# EAGLE board yacc1buss 2 (EAGLE 7.5.0)
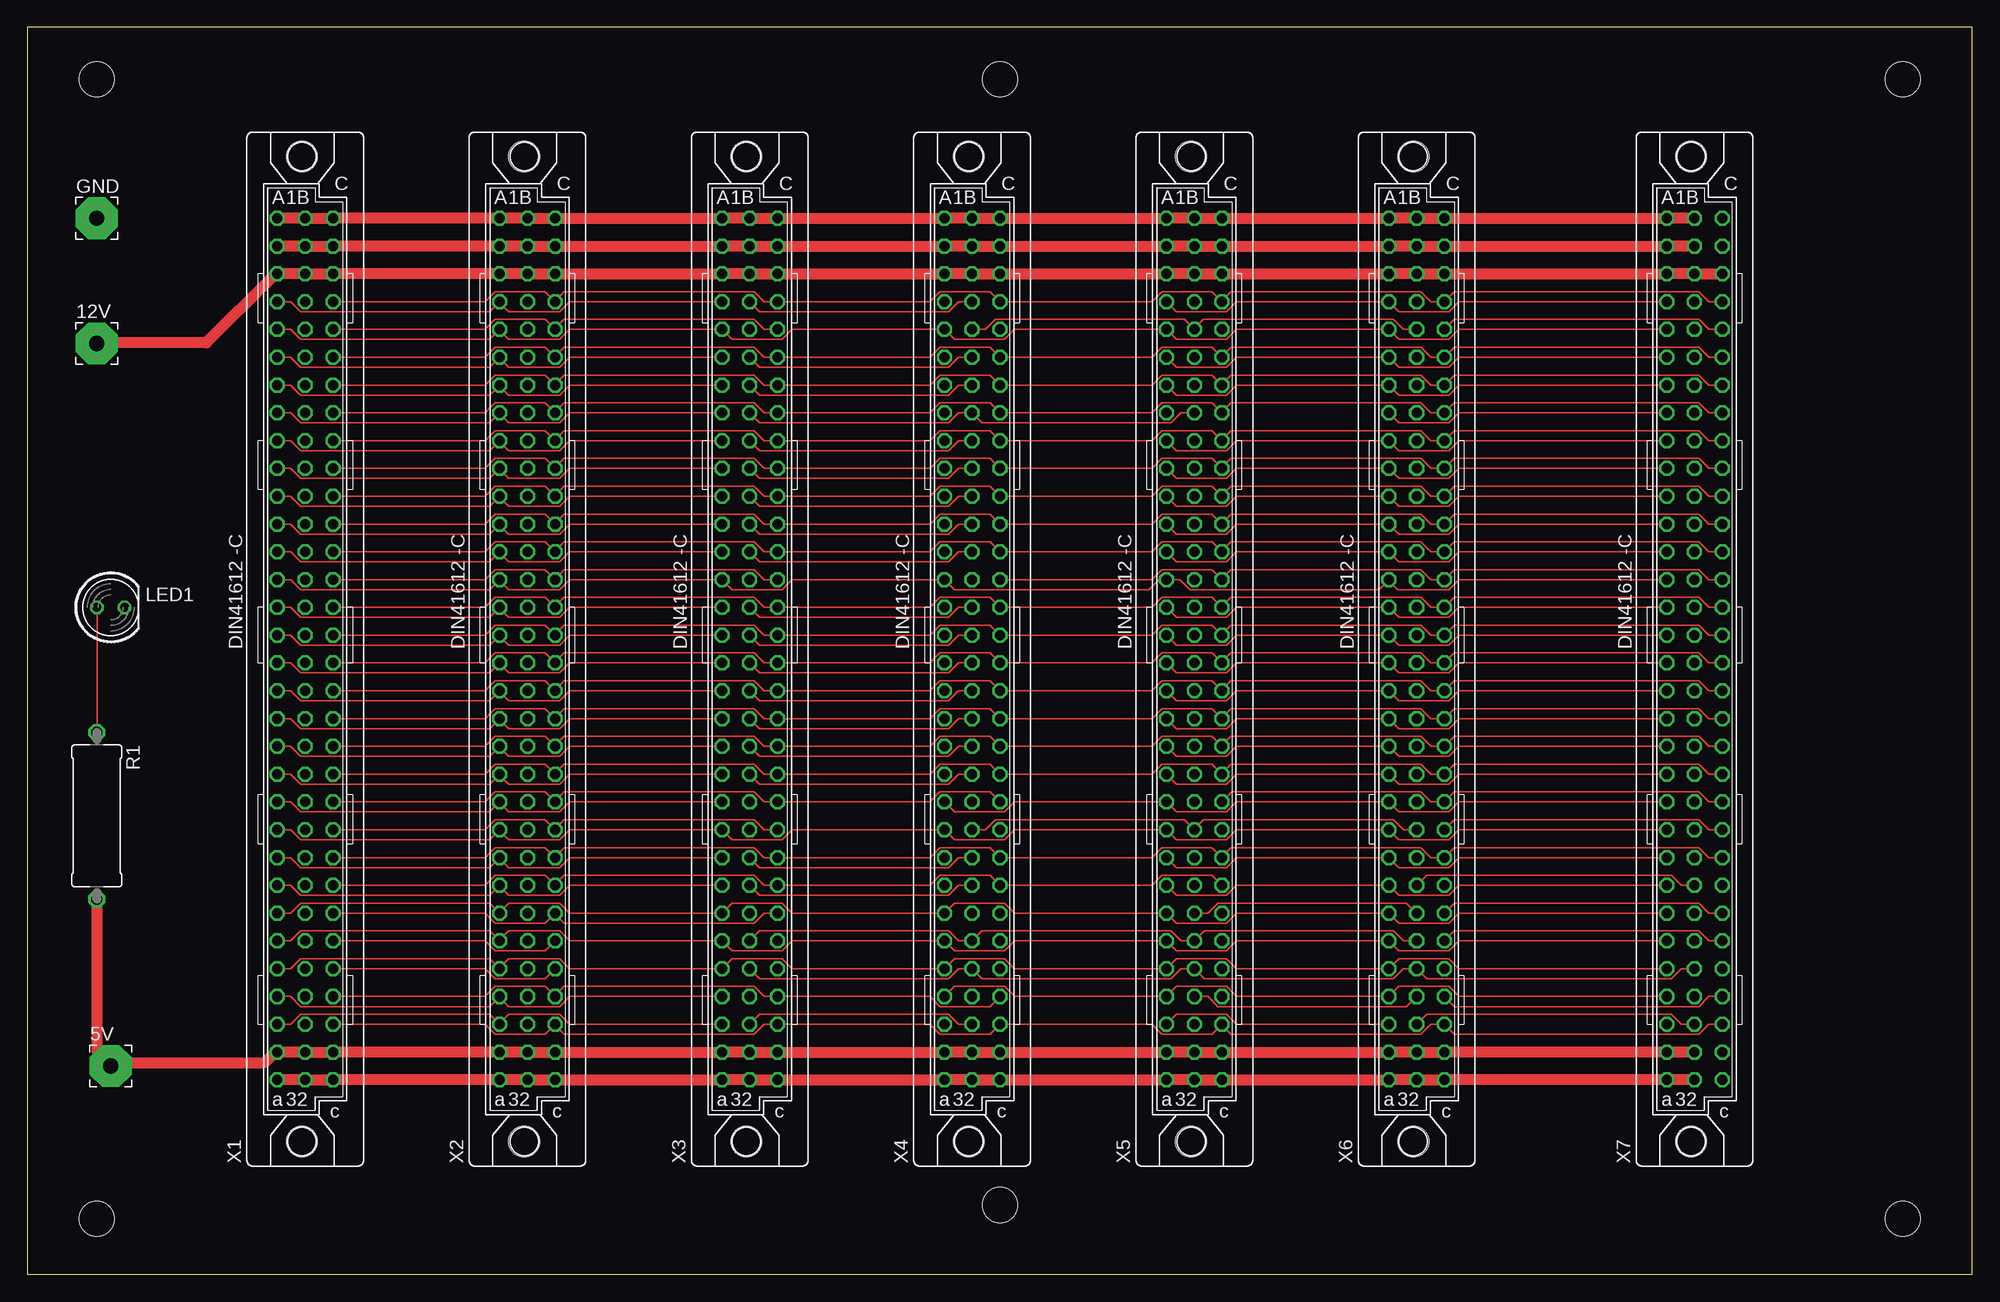
[diagram p0: board, top side]
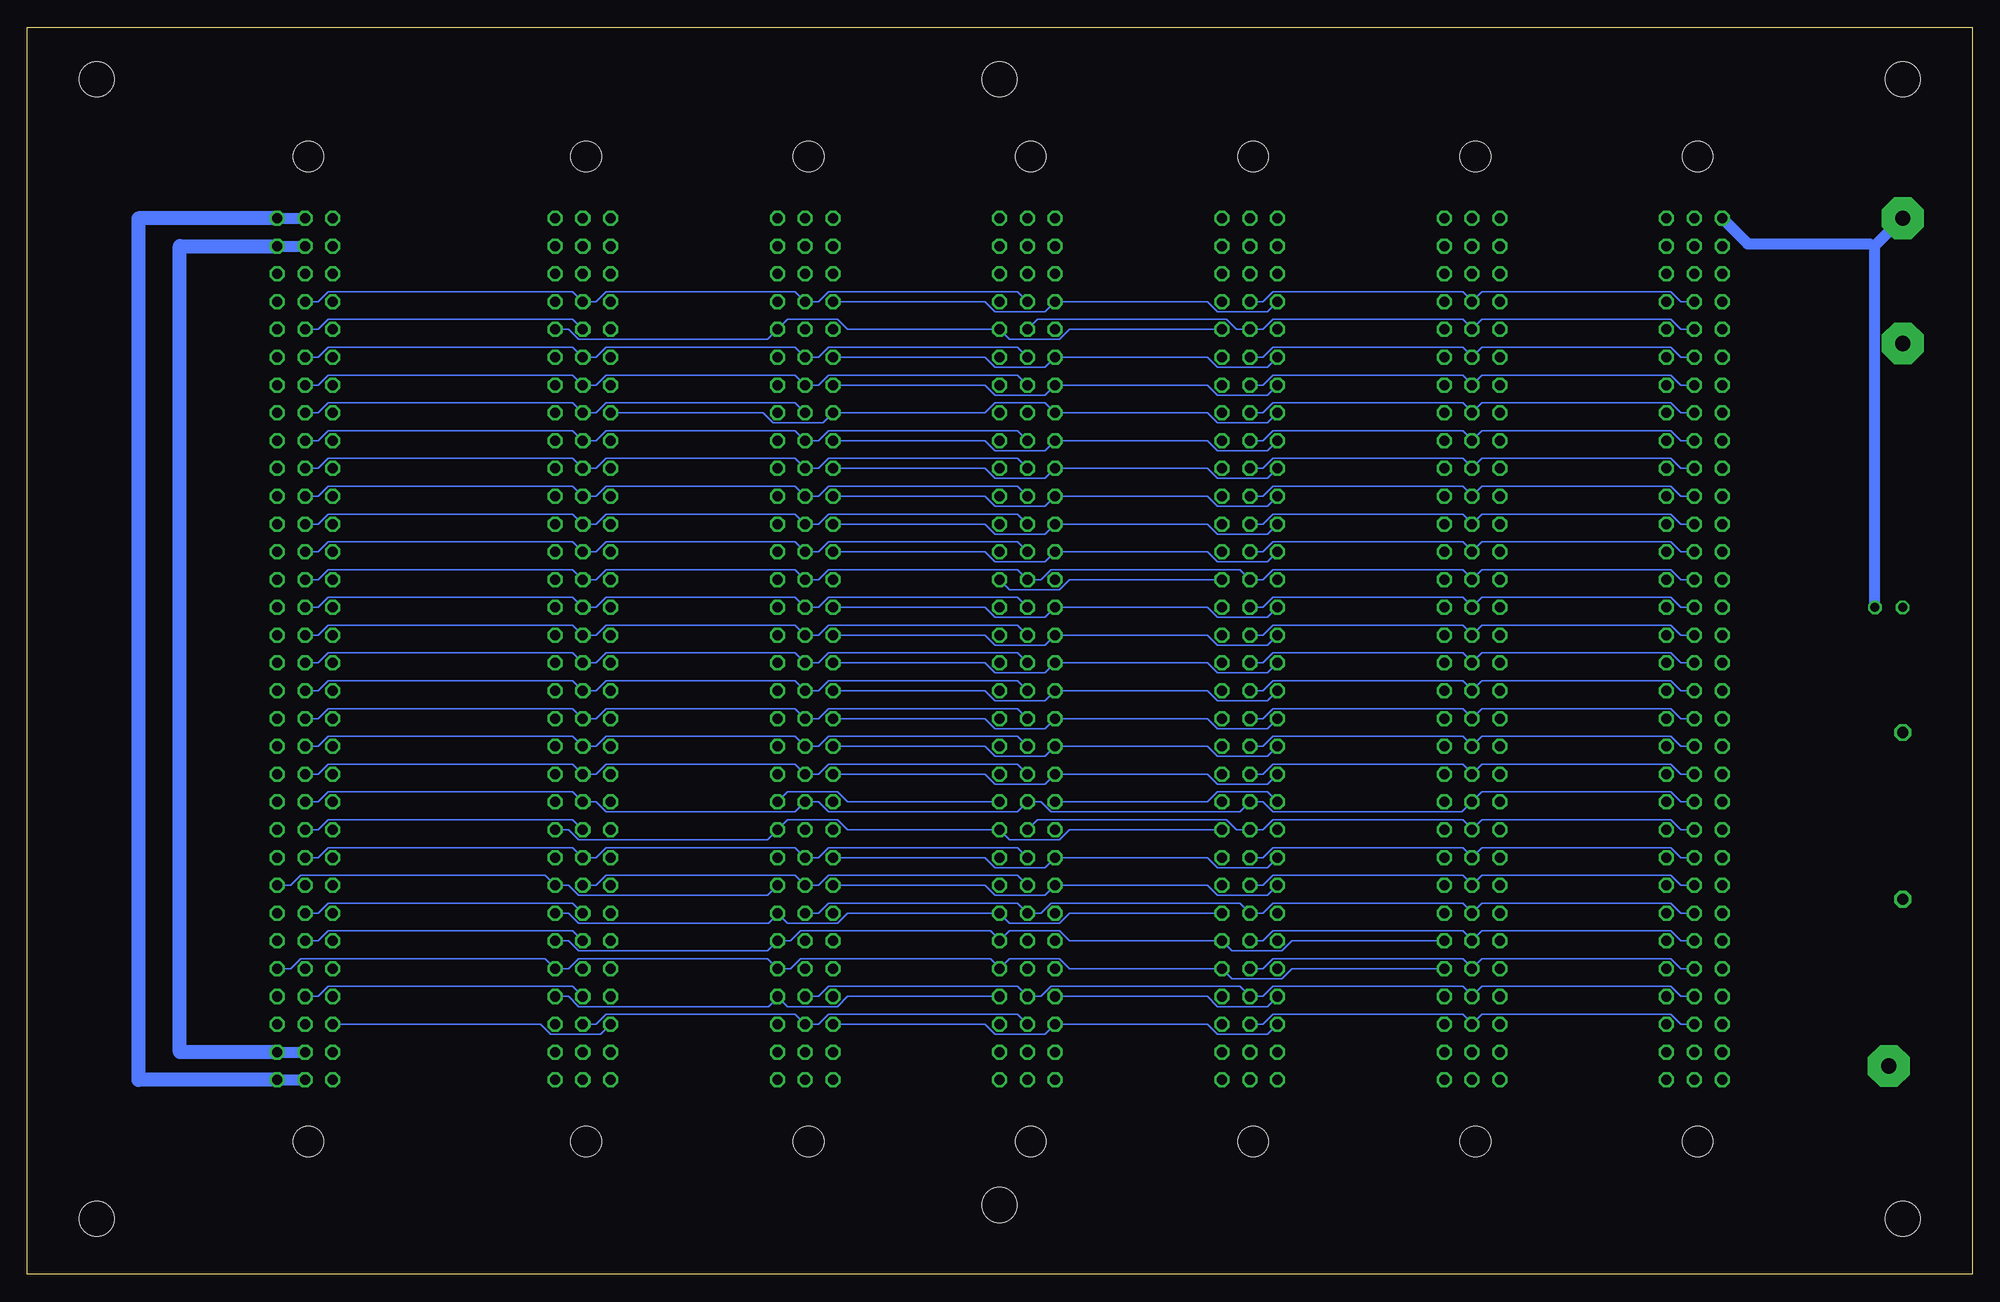
[diagram p1: board, bottom side, seen from below]

Size 177.78 x 113.97 mm. Coordinates in mm from the lower left corner, seen from the top.
Outline: 0,0 177.78,0 177.78,113.97 0,113.97 0,0
Copper layers (1*16): Top 0.0356mm / dielectric 1.5011mm / Bottom 0.0356mm
Design rules "LaenPCBOrder *": minimum track width 6mil, minimum drill 13mil, track to track 10mil, track to pad 6mil, pad to pad 6mil, via to via 6mil, smd to smd 6mil, copper to edge 15mil, drill to drill 6mil, minimum pad ring 7mil, minimum via ring 7mil, stop-mask expansion 3mil, vias tented up to drill 0mil, thermal gap 10mil
Net classes: 1 GND: width 1 mm; 2 5V: width 1 mm; 3 12V: width 1 mm
Holes 3.2 mm at 6.35,109.22 88.9,109.22 171.45,109.22 6.35,5.08 88.9,6.35 171.45,5.08

## Footprints (pad centres in the part's own frame; a part is rotated, then mirrored left to right if it is on the bottom)
3,81/1,4 = drill 1.397 pad 3.81 octagon: 1 0,0
LED5MM = drill 0.813 octagon: A -1.27,0; K 1.27,0
P0613/15 = drill 1.016 octagon: 1 -7.62,0; 2 7.62,0
FABC96S = drill 0.914 octagon: A1 -2.54,39.37; A2 -2.54,36.83; A3 -2.54,34.29; A4 -2.54,31.75; A5 -2.54,29.21; A6 -2.54,26.67; A7 -2.54,24.13; A8 -2.54,21.59; A9 -2.54,19.05; A10 -2.54,16.51; A11 -2.54,13.97; A12 -2.54,11.43; A13 -2.54,8.89; A14 -2.54,6.35; A15 -2.54,3.81; A16 -2.54,1.27; A17 -2.54,-1.27; A18 -2.54,-3.81; A19 -2.54,-6.35; A20 -2.54,-8.89; A21 -2.54,-11.43; A22 -2.54,-13.97; A23 -2.54,-16.51; A24 -2.54,-19.05; A25 -2.54,-21.59; A26 -2.54,-24.13; A27 -2.54,-26.67; A28 -2.54,-29.21; A29 -2.54,-31.75; A30 -2.54,-34.29; A31 -2.54,-36.83; A32 -2.54,-39.37; B1 0,39.37; B2 0,36.83; B3 0,34.29; B4 0,31.75; B5 0,29.21; B6 0,26.67; B7 0,24.13; B8 0,21.59; B9 0,19.05; B10 0,16.51; B11 0,13.97; B12 0,11.43; B13 0,8.89; B14 0,6.35; B15 0,3.81; B16 0,1.27; B17 0,-1.27; B18 0,-3.81; B19 0,-6.35; B20 0,-8.89; B21 0,-11.43; B22 0,-13.97; B23 0,-16.51; B24 0,-19.05; B25 0,-21.59; B26 0,-24.13; B27 0,-26.67; B28 0,-29.21; B29 0,-31.75; B30 0,-34.29; B31 0,-36.83; B32 0,-39.37; C1 2.54,39.37; C2 2.54,36.83; C3 2.54,34.29; C4 2.54,31.75; C5 2.54,29.21; C6 2.54,26.67; C7 2.54,24.13; C8 2.54,21.59; C9 2.54,19.05; C10 2.54,16.51; C11 2.54,13.97; C12 2.54,11.43; C13 2.54,8.89; C14 2.54,6.35; C15 2.54,3.81; C16 2.54,1.27; C17 2.54,-1.27; C18 2.54,-3.81; C19 2.54,-6.35; C20 2.54,-8.89; C21 2.54,-11.43; C22 2.54,-13.97; C23 2.54,-16.51; C24 2.54,-19.05; C25 2.54,-21.59; C26 2.54,-24.13; C27 2.54,-26.67; C28 2.54,-29.21; C29 2.54,-31.75; C30 2.54,-34.29; C31 2.54,-36.83; C32 2.54,-39.37 | hole 2.794: -0.305,45.009; -0.305,-45.009

## Placement (x,y rotation side)
5V  [3,81/1,4]  7.62,19.05 0 top
12V  [3,81/1,4]  6.35,85.09 0 top
GND  [3,81/1,4]  6.35,96.52 0 top
LED1  [LED5MM]  7.62,60.96 0 top
R1  330  [P0613/15]  6.35,41.91 270 top
X1  FABC96S  [FABC96S]  25.4,57.15 0 top
X2  FABC96S  [FABC96S]  45.72,57.15 0 top
X3  FABC96S  [FABC96S]  66.04,57.15 0 top
X4  FABC96S  [FABC96S]  86.36,57.15 0 top
X5  FABC96S  [FABC96S]  106.68,57.15 0 top
X6  FABC96S  [FABC96S]  127,57.15 0 top
X7  FABC96S  [FABC96S]  152.4,57.15 0 top

## Library data of the parts
5V 12V GND = wirepad
LED1 = led
R1 = resistor
X1-X7 = con-vg

## Nets
5V [5V]: 5V.1 R1.2 X1.A2 X1.A31 X1.B2 X1.B31 X1.C2 X1.C31 X2.A2 X2.A31 X2.B2 X2.B31 X2.C2 X2.C31 X3.A2 X3.A31 X3.B2 X3.B31 X3.C2 X3.C31 X4.A2 X4.A31 X4.B2 X4.B31 X4.C2 X4.C31 X5.A2 X5.A31 X5.B2 X5.B31 X5.C2 X5.C31 X6.A2 X6.A31 X6.B2 X6.B31 X6.C2 X6.C31 X7.A2 X7.A31 X7.B2 X7.B31 X7.C2 X7.C31
12V [12V]: 12V.1 X1.A3 X1.B3 X1.C3 X2.A3 X2.B3 X2.C3 X3.A3 X3.B3 X3.C3 X4.A3 X4.B3 X4.C3 X5.A3 X5.B3 X5.C3 X6.A3 X6.B3 X6.C3 X7.A3 X7.B3 X7.C3
GND [GND]: GND.1 LED1.K X1.A1 X1.A32 X1.B1 X1.B32 X1.C1 X1.C32 X2.A1 X2.A32 X2.B1 X2.B32 X2.C1 X2.C32 X3.A1 X3.A32 X3.B1 X3.B32 X3.C1 X3.C32 X4.A1 X4.A32 X4.B1 X4.B32 X4.C1 X4.C32 X5.A1 X5.A32 X5.B1 X5.B32 X5.C1 X5.C32 X6.A1 X6.A32 X6.B1 X6.B32 X6.C1 X6.C32 X7.A1 X7.A32 X7.B1 X7.B32 X7.C1 X7.C32
N$1: LED1.A R1.1
SIG0: X1.A4 X2.A4 X3.A4 X4.A4 X5.A4 X6.A4 X7.A4
SIG1: X1.B4 X2.B4 X3.B4 X4.B4 X5.B4 X6.B4 X7.B4
SIG2: X1.C4 X2.C4 X3.C4 X4.C4 X5.C4 X6.C4 X7.C4
SIG3: X1.A5 X2.A5 X3.A5 X4.A5 X5.A5 X6.A5 X7.A5
SIG4: X1.B5 X2.B5 X3.B5 X4.B5 X5.B5 X6.B5 X7.B5
SIG5: X1.C5 X2.C5 X3.C5 X4.C5 X5.C5 X6.C5 X7.C5
SIG6: X1.A6 X2.A6 X3.A6 X4.A6 X5.A6 X6.A6 X7.A6
SIG7: X1.B6 X2.B6 X3.B6 X4.B6 X5.B6 X6.B6 X7.B6
SIG8: X1.C6 X2.C6 X3.C6 X4.C6 X5.C6 X6.C6 X7.C6
SIG9: X1.A7 X2.A7 X3.A7 X4.A7 X5.A7 X6.A7 X7.A7
SIG10: X1.B7 X2.B7 X3.B7 X4.B7 X5.B7 X6.B7 X7.B7
SIG11: X1.C7 X2.C7 X3.C7 X4.C7 X5.C7 X6.C7 X7.C7
SIG12: X1.A8 X2.A8 X3.A8 X4.A8 X5.A8 X6.A8 X7.A8
SIG13: X1.B8 X2.B8 X3.B8 X4.B8 X5.B8 X6.B8 X7.B8
SIG14: X1.C8 X2.C8 X3.C8 X4.C8 X5.C8 X6.C8 X7.C8
SIG15: X1.A9 X2.A9 X3.A9 X4.A9 X5.A9 X6.A9 X7.A9
SIG16: X1.B9 X2.B9 X3.B9 X4.B9 X5.B9 X6.B9 X7.B9
SIG17: X1.C9 X2.C9 X3.C9 X4.C9 X5.C9 X6.C9 X7.C9
SIG18: X1.A10 X2.A10 X3.A10 X4.A10 X5.A10 X6.A10 X7.A10
SIG19: X1.B10 X2.B10 X3.B10 X4.B10 X5.B10 X6.B10 X7.B10
SIG20: X1.C10 X2.C10 X3.C10 X4.C10 X5.C10 X6.C10 X7.C10
SIG21: X1.A11 X2.A11 X3.A11 X4.A11 X5.A11 X6.A11 X7.A11
SIG22: X1.B11 X2.B11 X3.B11 X4.B11 X5.B11 X6.B11 X7.B11
SIG23: X1.C11 X2.C11 X3.C11 X4.C11 X5.C11 X6.C11 X7.C11
SIG24: X1.A12 X2.A12 X3.A12 X4.A12 X5.A12 X6.A12 X7.A12
SIG25: X1.B12 X2.B12 X3.B12 X4.B12 X5.B12 X6.B12 X7.B12
SIG26: X1.C12 X2.C12 X3.C12 X4.C12 X5.C12 X6.C12 X7.C12
SIG27: X1.A13 X2.A13 X3.A13 X4.A13 X5.A13 X6.A13 X7.A13
SIG28: X1.B13 X2.B13 X3.B13 X4.B13 X5.B13 X6.B13 X7.B13
SIG29: X1.C13 X2.C13 X3.C13 X4.C13 X5.C13 X6.C13 X7.C13
SIG30: X1.A14 X2.A14 X3.A14 X4.A14 X5.A14 X6.A14 X7.A14
SIG31: X1.B14 X2.B14 X3.B14 X4.B14 X5.B14 X6.B14 X7.B14
SIG32: X1.C14 X2.C14 X3.C14 X4.C14 X5.C14 X6.C14 X7.C14
SIG33: X1.A15 X2.A15 X3.A15 X4.A15 X5.A15 X6.A15 X7.A15
SIG34: X1.B15 X2.B15 X3.B15 X4.B15 X5.B15 X6.B15 X7.B15
SIG35: X1.C15 X2.C15 X3.C15 X4.C15 X5.C15 X6.C15 X7.C15
SIG36: X1.A16 X2.A16 X3.A16 X4.A16 X5.A16 X6.A16 X7.A16
SIG37: X1.B16 X2.B16 X3.B16 X4.B16 X5.B16 X6.B16 X7.B16
SIG38: X1.C16 X2.C16 X3.C16 X4.C16 X5.C16 X6.C16 X7.C16
SIG39: X1.A17 X2.A17 X3.A17 X4.A17 X5.A17 X6.A17 X7.A17
SIG40: X1.B17 X2.B17 X3.B17 X4.B17 X5.B17 X6.B17 X7.B17
SIG41: X1.C17 X2.C17 X3.C17 X4.C17 X5.C17 X6.C17 X7.C17
SIG42: X1.A18 X2.A18 X3.A18 X4.A18 X5.A18 X6.A18 X7.A18
SIG43: X1.B18 X2.B18 X3.B18 X4.B18 X5.B18 X6.B18 X7.B18
SIG44: X1.C18 X2.C18 X3.C18 X4.C18 X5.C18 X6.C18 X7.C18
SIG45: X1.A19 X2.A19 X3.A19 X4.A19 X5.A19 X6.A19 X7.A19
SIG46: X1.B19 X2.B19 X3.B19 X4.B19 X5.B19 X6.B19 X7.B19
SIG47: X1.C19 X2.C19 X3.C19 X4.C19 X5.C19 X6.C19 X7.C19
SIG48: X1.A20 X2.A20 X3.A20 X4.A20 X5.A20 X6.A20 X7.A20
SIG49: X1.B20 X2.B20 X3.B20 X4.B20 X5.B20 X6.B20 X7.B20
SIG50: X1.C20 X2.C20 X3.C20 X4.C20 X5.C20 X6.C20 X7.C20
SIG51: X1.A21 X2.A21 X3.A21 X4.A21 X5.A21 X6.A21 X7.A21
SIG52: X1.B21 X2.B21 X3.B21 X4.B21 X5.B21 X6.B21 X7.B21
SIG53: X1.C21 X2.C21 X3.C21 X4.C21 X5.C21 X6.C21 X7.C21
SIG54: X1.A22 X2.A22 X3.A22 X4.A22 X5.A22 X6.A22 X7.A22
SIG55: X1.B22 X2.B22 X3.B22 X4.B22 X5.B22 X6.B22 X7.B22
SIG56: X1.C22 X2.C22 X3.C22 X4.C22 X5.C22 X6.C22 X7.C22
SIG57: X1.A23 X2.A23 X3.A23 X4.A23 X5.A23 X6.A23 X7.A23
SIG58: X1.B23 X2.B23 X3.B23 X4.B23 X5.B23 X6.B23 X7.B23
SIG59: X1.C23 X2.C23 X3.C23 X4.C23 X5.C23 X6.C23 X7.C23
SIG60: X1.A24 X2.A24 X3.A24 X4.A24 X5.A24 X6.A24 X7.A24
SIG61: X1.B24 X2.B24 X3.B24 X4.B24 X5.B24 X6.B24 X7.B24
SIG62: X1.C24 X2.C24 X3.C24 X4.C24 X5.C24 X6.C24 X7.C24
SIG63: X1.A25 X2.A25 X3.A25 X4.A25 X5.A25 X6.A25 X7.A25
SIG64: X1.B25 X2.B25 X3.B25 X4.B25 X5.B25 X6.B25 X7.B25
SIG65: X1.C25 X2.C25 X3.C25 X4.C25 X5.C25 X6.C25 X7.C25
SIG66: X1.A26 X2.A26 X3.A26 X4.A26 X5.A26 X6.A26 X7.A26
SIG67: X1.B26 X2.B26 X3.B26 X4.B26 X5.B26 X6.B26 X7.B26
SIG68: X1.C26 X2.C26 X3.C26 X4.C26 X5.C26 X6.C26 X7.C26
SIG69: X1.A27 X2.A27 X3.A27 X4.A27 X5.A27 X6.A27 X7.A27
SIG70: X1.B27 X2.B27 X3.B27 X4.B27 X5.B27 X6.B27 X7.B27
SIG71: X1.C27 X2.C27 X3.C27 X4.C27 X5.C27 X6.C27 X7.C27
SIG72: X1.A28 X2.A28 X3.A28 X4.A28 X5.A28 X6.A28 X7.A28
SIG73: X1.B28 X2.B28 X3.B28 X4.B28 X5.B28 X6.B28 X7.B28
SIG74: X1.C28 X2.C28 X3.C28 X4.C28 X5.C28 X6.C28 X7.C28
SIG75: X1.A29 X2.A29 X3.A29 X4.A29 X5.A29 X6.A29 X7.A29
SIG76: X1.B29 X2.B29 X3.B29 X4.B29 X5.B29 X6.B29 X7.B29
SIG77: X1.C29 X2.C29 X3.C29 X4.C29 X5.C29 X6.C29 X7.C29
SIG78: X1.A30 X2.A30 X3.A30 X4.A30 X5.A30 X6.A30 X7.A30
SIG79: X1.B30 X2.B30 X3.B30 X4.B30 X5.B30 X6.B30 X7.B30
SIG80: X1.C30 X2.C30 X3.C30 X4.C30 X5.C30 X6.C30 X7.C30

## Tracks (layer width: path | path; a pad name or v marks a point on that pad's centre or on a via)
5V
  Top 1: R1.2 6.4,34.24 6.4,20.32 7.62,19.1 5V.1 8.03,19.3 21.64,19.3 22.45,20.12 X1.A31 X1.B31 X1.C31 X2.A31 X2.B31 X2.C31 X3.A31 X3.B31 X3.C31 X4.A31 X4.B31 X4.C31 X5.A31 X5.B31 X5.C31 X6.A31 X6.B31 X6.C31 X7.A31 X7.B31 | X7.B2 X7.A2 X6.C2 X6.B2 X6.A2 X5.C2 X5.B2 X5.A2 X4.C2 X4.B2 X4.A2 X3.C2 X3.B2 X3.A2 X2.C2 X2.B2 X2.A2 X1.C2 X1.B2 X1.A2
  Bottom 1: X7.C31 X7.B31 | X7.C2 X7.B2
  Bottom 1.27: X7.C31 163.83,20.32 163.83,93.98 X7.C2
12V
  Top 1: X7.C3 X7.B3 X7.A3 X6.C3 X6.B3 X6.A3 X5.C3 X5.B3 X5.A3 X4.C3 X4.B3 X4.A3 X3.C3 X3.B3 X3.A3 X2.C3 X2.B3 X2.A3 X1.C3 X1.B3 X1.A3 22.45,91.24 16.36,85.14 6.4,85.14 12V.1
GND
  Top 1: X1.A32 X1.B32 X1.C32 X2.A32 X2.B32 X2.C32 X3.A32 X3.B32 X3.C32 X4.A32 X4.B32 X4.C32 X5.A32 X5.B32 X5.C32 X6.A32 X6.B32 X6.C32 X7.A32 X7.B32 | X7.B1 X7.A1 X6.C1 X6.B1 X6.A1 X5.C1 X5.B1 X5.A1 X4.C1 X4.B1 X4.A1 X3.C1 X3.B1 X3.A1 X2.C1 X2.B1 X2.A1 X1.C1 X1.B1 X1.A1
  Bottom 1: X7.C32 X7.B32 | X7.C1 X7.B1 | 8.94,93.98 8.94,60.96 LED1.K | 8.94,93.98 6.4,96.52 GND.1 | X1.A1 20.52,94.18 9.35,94.18 8.94,93.98
  Bottom 1.27: X7.C1 167.64,96.52 167.64,17.78 X7.C32
N$1
  Top 0.152: LED1.A 6.4,60.96 6.4,49.58 R1.1
SIG0
  Top 0.152: X1.A4 24.08,88.9 24.99,87.99 42.27,87.99 X2.A4 43.18,88.8 43.99,87.99 48.67,87.99 49.58,88.9 X3.A4 | X5.A4 105.05,87.99 109.63,87.99 110.54,88.9 X6.A4 125.37,87.99 129.95,87.99 130.86,88.9 X7.A4
  Bottom 0.152: X3.A4 64.41,87.99 68.99,87.99 69.9,88.9 X4.A4 84.73,87.99 89.31,87.99 90.22,88.9 X5.A4
SIG1
  Top 0.152: X4.B4 85.14,88.9 84.23,87.99 66.95,87.99 X3.B4
  Bottom 0.152: X1.B4 26.62,88.9 27.53,89.81 44.81,89.81 X2.B4 45.72,89 46.53,89.81 63.91,89.81 64.82,88.9 X3.B4 | X4.B4 87.27,89.81 104.55,89.81 105.46,88.9 X5.B4 107.59,89.81 124.87,89.81 125.78,88.9 X6.B4 127.91,89.81 150.27,89.81 151.18,88.9 X7.B4
SIG2
  Top 0.152: X1.C4 41.86,88.9 42.77,89.81 47.35,89.81 X2.C4 48.26,89 49.07,89.81 66.45,89.81 67.36,88.9 X3.C4 82.5,88.9 83.41,89.81 87.99,89.81 X4.C4 102.82,88.9 103.73,89.81 108.31,89.81 X5.C4 109.22,89 110.03,89.81 127.41,89.81 128.32,88.9 X6.C4 130.45,89.81 152.81,89.81 153.72,88.9 X7.C4
SIG3
  Top 0.152: X1.A5 24.08,86.36 24.99,85.45 42.27,85.45 X2.A5 43.18,86.26 43.99,85.45 48.67,85.45 49.58,86.36 X3.A5 64.41,85.45 68.99,85.45 69.9,86.36 X4.A5 84.73,85.45 89.31,85.45 90.22,86.36 X5.A5 105.05,85.45 109.63,85.45 110.54,86.36 X6.A5 125.37,85.45 129.95,85.45 130.86,86.36 X7.A5
SIG4
  Top 0.152: X4.B5 87.58,86.36 88.49,87.27 105.77,87.27 X5.B5 106.68,86.46 107.49,87.27 124.87,87.27 125.78,86.36 X6.B5
  Bottom 0.152: X1.B5 26.62,86.36 27.53,87.27 44.81,87.27 X2.B5 45.72,86.46 46.53,87.27 63.91,87.27 64.82,86.36 X3.B5 67.26,86.36 68.17,87.27 85.45,87.27 X4.B5 | X7.B5 151.18,86.36 150.27,87.27 127.91,87.27 X6.B5
SIG5
  Top 0.152: X1.C5 41.86,86.36 42.77,87.27 47.35,87.27 X2.C5 48.26,86.46 49.07,87.27 66.45,87.27 67.36,86.36 X3.C5 | X7.C5 153.72,86.36 152.81,87.27 130.45,87.27 X6.C5
  Bottom 0.152: X6.C5 128.32,86.36 127.41,85.45 110.13,85.45 X5.C5 108.31,87.27 103.73,87.27 102.82,86.36 X4.C5 87.99,85.45 83.41,85.45 82.5,86.36 X3.C5
SIG6
  Top 0.152: X1.A6 24.08,83.82 24.99,82.91 42.27,82.91 X2.A6 43.18,83.72 43.99,82.91 48.67,82.91 49.58,83.82 X3.A6 | X5.A6 105.05,82.91 109.63,82.91 110.54,83.82 X6.A6 125.37,82.91 129.95,82.91 130.86,83.82 X7.A6
  Bottom 0.152: X3.A6 64.41,82.91 68.99,82.91 69.9,83.82 X4.A6 84.73,82.91 89.31,82.91 90.22,83.82 X5.A6
SIG7
  Top 0.152: X4.B6 85.14,83.82 84.23,82.91 66.95,82.91 X3.B6
  Bottom 0.152: X1.B6 26.62,83.82 27.53,84.73 44.81,84.73 X2.B6 45.72,83.92 46.53,84.73 63.91,84.73 64.82,83.82 X3.B6 | X4.B6 87.27,84.73 104.55,84.73 105.46,83.82 X5.B6 107.59,84.73 124.87,84.73 125.78,83.82 X6.B6 127.91,84.73 150.27,84.73 151.18,83.82 X7.B6
SIG8
  Top 0.152: X1.C6 41.86,83.82 42.77,84.73 47.35,84.73 X2.C6 48.26,83.92 49.07,84.73 66.45,84.73 67.36,83.82 X3.C6 82.5,83.82 83.41,84.73 87.99,84.73 X4.C6 102.82,83.82 103.73,84.73 108.31,84.73 X5.C6 109.22,83.92 110.03,84.73 127.41,84.73 128.32,83.82 X6.C6 130.45,84.73 152.81,84.73 153.72,83.82 X7.C6
SIG9
  Top 0.152: X1.A7 24.08,81.28 24.99,80.37 42.27,80.37 X2.A7 43.18,81.18 43.99,80.37 48.67,80.37 49.58,81.28 X3.A7 | X5.A7 105.05,80.37 109.63,80.37 110.54,81.28 X6.A7 125.37,80.37 129.95,80.37 130.86,81.28 X7.A7
  Bottom 0.152: X3.A7 64.41,80.37 68.99,80.37 69.9,81.28 X4.A7 84.73,80.37 89.31,80.37 90.22,81.28 X5.A7
SIG10
  Top 0.152: X4.B7 85.14,81.28 84.23,80.37 66.95,80.37 X3.B7
  Bottom 0.152: X1.B7 26.62,81.28 27.53,82.19 44.81,82.19 X2.B7 45.72,81.38 46.53,82.19 63.91,82.19 64.82,81.28 X3.B7 | X4.B7 87.27,82.19 104.55,82.19 105.46,81.28 X5.B7 107.59,82.19 124.87,82.19 125.78,81.28 X6.B7 127.91,82.19 150.27,82.19 151.18,81.28 X7.B7
SIG11
  Top 0.152: X1.C7 41.86,81.28 42.77,82.19 47.35,82.19 X2.C7 48.26,81.38 49.07,82.19 66.45,82.19 67.36,81.28 X3.C7 82.5,81.28 83.41,82.19 87.99,82.19 X4.C7 102.82,81.28 103.73,82.19 108.31,82.19 X5.C7 109.22,81.38 110.03,82.19 127.41,82.19 128.32,81.28 X6.C7 130.45,82.19 152.81,82.19 153.72,81.28 X7.C7
SIG12
  Top 0.152: X1.A8 24.08,78.74 24.99,77.83 42.27,77.83 X2.A8 43.18,78.64 43.99,77.83 48.67,77.83 49.58,78.74 X3.A8 | X7.A8 130.86,78.74 129.95,77.83 125.37,77.83 X6.A8
  Bottom 0.152: X3.A8 64.41,77.83 68.99,77.83 69.9,78.74 X4.A8 84.73,79.65 89.31,79.65 90.22,78.74 X5.A8 105.05,77.83 109.63,77.83 110.54,78.74 X6.A8
SIG13
  Top 0.152: X3.B8 66.95,77.83 84.23,77.83 85.14,78.74 X4.B8 87.27,77.83 104.55,77.83 105.46,78.74 X5.B8
  Bottom 0.152: X1.B8 26.62,78.74 27.53,79.65 44.81,79.65 X2.B8 45.72,78.84 46.53,79.65 63.91,79.65 64.82,78.74 X3.B8 | X5.B8 107.59,79.65 124.87,79.65 125.78,78.74 X6.B8 127.91,79.65 150.27,79.65 151.18,78.74 X7.B8
SIG14
  Top 0.152: X1.C8 41.86,78.74 42.77,79.65 47.35,79.65 X2.C8 48.26,78.84 49.07,79.65 66.45,79.65 67.36,78.74 X3.C8 82.5,78.74 83.41,79.65 87.99,79.65 X4.C8 102.82,78.74 103.73,79.65 108.31,79.65 X5.C8 109.22,78.84 110.03,79.65 127.41,79.65 128.32,78.74 X6.C8 130.45,79.65 152.81,79.65 153.72,78.74 X7.C8
SIG15
  Top 0.152: X1.A9 24.08,76.2 24.99,75.29 42.27,75.29 X2.A9 43.18,76.1 43.99,75.29 48.67,75.29 49.58,76.2 X3.A9 | X5.A9 105.05,75.29 109.63,75.29 110.54,76.2 X6.A9 125.37,75.29 129.95,75.29 130.86,76.2 X7.A9
  Bottom 0.152: X3.A9 64.41,75.29 68.99,75.29 69.9,76.2 X4.A9 84.73,75.29 89.31,75.29 90.22,76.2 X5.A9
SIG16
  Top 0.152: X4.B9 85.14,76.2 84.23,75.29 66.95,75.29 X3.B9
  Bottom 0.152: X1.B9 26.62,76.2 27.53,77.11 44.81,77.11 X2.B9 45.72,76.3 46.53,77.11 63.91,77.11 64.82,76.2 X3.B9 | X4.B9 87.27,77.11 104.55,77.11 105.46,76.2 X5.B9 107.59,77.11 124.87,77.11 125.78,76.2 X6.B9 127.91,77.11 150.27,77.11 151.18,76.2 X7.B9
SIG17
  Top 0.152: X1.C9 41.86,76.2 42.77,77.11 47.35,77.11 X2.C9 48.26,76.3 49.07,77.11 66.45,77.11 67.36,76.2 X3.C9 82.5,76.2 83.41,77.11 87.99,77.11 X4.C9 102.82,76.2 103.73,77.11 108.31,77.11 X5.C9 109.22,76.3 110.03,77.11 127.41,77.11 128.32,76.2 X6.C9 130.45,77.11 152.81,77.11 153.72,76.2 X7.C9
SIG18
  Top 0.152: X1.A10 24.08,73.66 24.99,72.75 42.27,72.75 X2.A10 43.18,73.56 43.99,72.75 48.67,72.75 49.58,73.66 X3.A10 | X5.A10 105.05,72.75 109.63,72.75 110.54,73.66 X6.A10 125.37,72.75 129.95,72.75 130.86,73.66 X7.A10
  Bottom 0.152: X3.A10 64.41,72.75 68.99,72.75 69.9,73.66 X4.A10 84.73,72.75 89.31,72.75 90.22,73.66 X5.A10
SIG19
  Top 0.152: X4.B10 85.14,73.66 84.23,72.75 66.95,72.75 X3.B10
  Bottom 0.152: X1.B10 26.62,73.66 27.53,74.57 44.81,74.57 X2.B10 45.72,73.76 46.53,74.57 63.91,74.57 64.82,73.66 X3.B10 | X4.B10 87.27,74.57 104.55,74.57 105.46,73.66 X5.B10 107.59,74.57 124.87,74.57 125.78,73.66 X6.B10 127.91,74.57 150.27,74.57 151.18,73.66 X7.B10
SIG20
  Top 0.152: X1.C10 41.86,73.66 42.77,74.57 47.35,74.57 X2.C10 48.26,73.76 49.07,74.57 66.45,74.57 67.36,73.66 X3.C10 82.5,73.66 83.41,74.57 87.99,74.57 X4.C10 102.82,73.66 103.73,74.57 108.31,74.57 X5.C10 109.22,73.76 110.03,74.57 127.41,74.57 128.32,73.66 X6.C10 130.45,74.57 152.81,74.57 153.72,73.66 X7.C10
SIG21
  Top 0.152: X1.A11 24.08,71.12 24.99,70.21 42.27,70.21 X2.A11 43.18,71.02 43.99,70.21 48.67,70.21 49.58,71.12 X3.A11 | X5.A11 105.05,70.21 109.63,70.21 110.54,71.12 X6.A11 125.37,70.21 129.95,70.21 130.86,71.12 X7.A11
  Bottom 0.152: X3.A11 64.41,70.21 68.99,70.21 69.9,71.12 X4.A11 84.73,70.21 89.31,70.21 90.22,71.12 X5.A11
SIG22
  Top 0.152: X4.B11 85.14,71.12 84.23,70.21 66.95,70.21 X3.B11
  Bottom 0.152: X1.B11 26.62,71.12 27.53,72.03 44.81,72.03 X2.B11 45.72,71.22 46.53,72.03 63.91,72.03 64.82,71.12 X3.B11 | X4.B11 87.27,72.03 104.55,72.03 105.46,71.12 X5.B11 107.59,72.03 124.87,72.03 125.78,71.12 X6.B11 127.91,72.03 150.27,72.03 151.18,71.12 X7.B11
SIG23
  Top 0.152: X1.C11 41.86,71.12 42.77,72.03 47.35,72.03 X2.C11 48.26,71.22 49.07,72.03 66.45,72.03 67.36,71.12 X3.C11 82.5,71.12 83.41,72.03 87.99,72.03 X4.C11 102.82,71.12 103.73,72.03 108.31,72.03 X5.C11 109.22,71.22 110.03,72.03 127.41,72.03 128.32,71.12 X6.C11 130.45,72.03 152.81,72.03 153.72,71.12 X7.C11
SIG24
  Top 0.152: X1.A12 24.08,68.58 24.99,67.67 42.27,67.67 X2.A12 43.18,68.48 43.99,67.67 48.67,67.67 49.58,68.58 X3.A12 | X5.A12 105.05,67.67 109.63,67.67 110.54,68.58 X6.A12 125.37,67.67 129.95,67.67 130.86,68.58 X7.A12
  Bottom 0.152: X3.A12 64.41,67.67 68.99,67.67 69.9,68.58 X4.A12 84.73,67.67 89.31,67.67 90.22,68.58 X5.A12
SIG25
  Top 0.152: X4.B12 85.14,68.58 84.23,67.67 66.95,67.67 X3.B12
  Bottom 0.152: X1.B12 26.62,68.58 27.53,69.49 44.81,69.49 X2.B12 45.72,68.68 46.53,69.49 63.91,69.49 64.82,68.58 X3.B12 | X4.B12 87.27,69.49 104.55,69.49 105.46,68.58 X5.B12 107.59,69.49 124.87,69.49 125.78,68.58 X6.B12 127.91,69.49 150.27,69.49 151.18,68.58 X7.B12
SIG26
  Top 0.152: X1.C12 41.86,68.58 42.77,69.49 47.35,69.49 X2.C12 48.26,68.68 49.07,69.49 66.45,69.49 67.36,68.58 X3.C12 82.5,68.58 83.41,69.49 87.99,69.49 X4.C12 102.82,68.58 103.73,69.49 108.31,69.49 X5.C12 109.22,68.68 110.03,69.49 127.41,69.49 128.32,68.58 X6.C12 130.45,69.49 152.81,69.49 153.72,68.58 X7.C12
SIG27
  Top 0.152: X1.A13 24.08,66.04 24.99,65.13 42.27,65.13 X2.A13 43.18,65.94 43.99,65.13 48.67,65.13 49.58,66.04 X3.A13 | X5.A13 105.05,65.13 109.63,65.13 110.54,66.04 X6.A13 125.37,65.13 129.95,65.13 130.86,66.04 X7.A13
  Bottom 0.152: X3.A13 64.41,65.13 68.99,65.13 69.9,66.04 X4.A13 84.73,65.13 89.31,65.13 90.22,66.04 X5.A13
SIG28
  Top 0.152: X4.B13 85.14,66.04 84.23,65.13 66.95,65.13 X3.B13
  Bottom 0.152: X1.B13 26.62,66.04 27.53,66.95 44.81,66.95 X2.B13 45.72,66.14 46.53,66.95 63.91,66.95 64.82,66.04 X3.B13 | X4.B13 87.27,66.95 104.55,66.95 105.46,66.04 X5.B13 107.59,66.95 124.87,66.95 125.78,66.04 X6.B13 127.91,66.95 150.27,66.95 151.18,66.04 X7.B13
SIG29
  Top 0.152: X1.C13 41.86,66.04 42.77,66.95 47.35,66.95 X2.C13 48.26,66.14 49.07,66.95 66.45,66.95 67.36,66.04 X3.C13 82.5,66.04 83.41,66.95 87.99,66.95 X4.C13 102.82,66.04 103.73,66.95 108.31,66.95 X5.C13 109.22,66.14 110.03,66.95 127.41,66.95 128.32,66.04 X6.C13 130.45,66.95 152.81,66.95 153.72,66.04 X7.C13
SIG30
  Top 0.152: X7.A14 130.86,63.5 129.95,62.59 125.27,62.59 124.46,63.4 X6.A14 123.55,62.59 106.27,62.59 105.36,63.5 X5.A14 103.43,63.5 102.51,62.59 84.73,62.59 X4.A14 69.9,63.5 68.99,62.59 64.41,62.59 X3.A14 49.58,63.5 48.67,62.59 43.99,62.59 43.18,63.4 X2.A14 42.27,62.59 24.99,62.59 24.08,63.5 X1.A14
SIG31
  Bottom 0.152: X1.B14 26.62,63.5 27.53,64.41 44.81,64.41 X2.B14 45.72,63.6 46.53,64.41 63.91,64.41 64.82,63.5 X3.B14 66.95,64.41 84.23,64.41 85.14,63.5 X4.B14 87.27,64.41 104.55,64.41 105.46,63.5 X5.B14 107.59,64.41 124.87,64.41 125.78,63.5 X6.B14 127.91,64.41 150.27,64.41 151.18,63.5 X7.B14
SIG32
  Top 0.152: X1.C14 41.86,63.5 42.77,64.41 47.35,64.41 X2.C14 48.26,63.6 49.07,64.41 66.45,64.41 67.36,63.5 X3.C14 | X4.C14 102.82,63.5 103.73,64.41 108.31,64.41 X5.C14 109.22,63.6 110.03,64.41 127.41,64.41 128.32,63.5 X6.C14 130.45,64.41 152.81,64.41 153.72,63.5 X7.C14
  Bottom 0.152: X3.C14 82.5,63.5 83.41,62.59 87.99,62.59 X4.C14
SIG33
  Top 0.152: X1.A15 24.08,60.96 24.99,60.05 42.27,60.05 X2.A15 43.18,60.86 43.99,60.05 48.67,60.05 49.58,60.96 X3.A15 | X5.A15 105.05,60.05 109.63,60.05 110.54,60.96 X6.A15 125.37,60.05 129.95,60.05 130.86,60.96 X7.A15
  Bottom 0.152: X3.A15 64.41,60.05 68.99,60.05 69.9,60.96 X4.A15 84.73,60.05 89.31,60.05 90.22,60.96 X5.A15
SIG34
  Top 0.152: X4.B15 85.14,60.96 84.23,60.05 66.95,60.05 X3.B15
  Bottom 0.152: X1.B15 26.62,60.96 27.53,61.87 44.81,61.87 X2.B15 45.72,61.06 46.53,61.87 63.91,61.87 64.82,60.96 X3.B15 | X4.B15 87.27,61.87 104.55,61.87 105.46,60.96 X5.B15 107.59,61.87 124.87,61.87 125.78,60.96 X6.B15 127.91,61.87 150.27,61.87 151.18,60.96 X7.B15
SIG35
  Top 0.152: X1.C15 41.86,60.96 42.77,61.87 47.35,61.87 X2.C15 48.26,61.06 49.07,61.87 66.45,61.87 67.36,60.96 X3.C15 82.5,60.96 83.41,61.87 87.99,61.87 X4.C15 102.82,60.96 103.73,61.87 108.31,61.87 X5.C15 109.22,61.06 110.03,61.87 127.41,61.87 128.32,60.96 X6.C15 130.45,61.87 152.81,61.87 153.72,60.96 X7.C15
SIG36
  Top 0.152: X1.A16 24.08,58.42 24.99,57.51 42.27,57.51 X2.A16 43.18,58.32 43.99,57.51 48.67,57.51 49.58,58.42 X3.A16 | X5.A16 105.05,57.51 109.63,57.51 110.54,58.42 X6.A16 125.37,57.51 129.95,57.51 130.86,58.42 X7.A16
  Bottom 0.152: X3.A16 64.41,57.51 68.99,57.51 69.9,58.42 X4.A16 84.73,57.51 89.31,57.51 90.22,58.42 X5.A16
SIG37
  Top 0.152: X4.B16 85.14,58.42 84.23,57.51 66.95,57.51 X3.B16
  Bottom 0.152: X1.B16 26.62,58.42 27.53,59.33 44.81,59.33 X2.B16 45.72,58.52 46.53,59.33 63.91,59.33 64.82,58.42 X3.B16 | X4.B16 87.27,59.33 104.55,59.33 105.46,58.42 X5.B16 107.59,59.33 124.87,59.33 125.78,58.42 X6.B16 127.91,59.33 150.27,59.33 151.18,58.42 X7.B16
SIG38
  Top 0.152: X1.C16 41.86,58.42 42.77,59.33 47.35,59.33 X2.C16 48.26,58.52 49.07,59.33 66.45,59.33 67.36,58.42 X3.C16 82.5,58.42 83.41,59.33 87.99,59.33 X4.C16 102.82,58.42 103.73,59.33 108.31,59.33 X5.C16 109.22,58.52 110.03,59.33 127.41,59.33 128.32,58.42 X6.C16 130.45,59.33 152.81,59.33 153.72,58.42 X7.C16
SIG39
  Top 0.152: X1.A17 24.08,55.88 24.99,54.97 42.27,54.97 X2.A17 43.18,55.78 43.99,54.97 48.67,54.97 49.58,55.88 X3.A17 | X5.A17 105.05,54.97 109.63,54.97 110.54,55.88 X6.A17 125.37,54.97 129.95,54.97 130.86,55.88 X7.A17
  Bottom 0.152: X3.A17 64.41,54.97 68.99,54.97 69.9,55.88 X4.A17 84.73,54.97 89.31,54.97 90.22,55.88 X5.A17
SIG40
  Top 0.152: X4.B17 85.14,55.88 84.23,54.97 66.95,54.97 X3.B17
  Bottom 0.152: X1.B17 26.62,55.88 27.53,56.79 44.81,56.79 X2.B17 45.72,55.98 46.53,56.79 63.91,56.79 64.82,55.88 X3.B17 | X4.B17 87.27,56.79 104.55,56.79 105.46,55.88 X5.B17 107.59,56.79 124.87,56.79 125.78,55.88 X6.B17 127.91,56.79 150.27,56.79 151.18,55.88 X7.B17
SIG41
  Top 0.152: X1.C17 41.86,55.88 42.77,56.79 47.35,56.79 X2.C17 48.26,55.98 49.07,56.79 66.45,56.79 67.36,55.88 X3.C17 82.5,55.88 83.41,56.79 87.99,56.79 X4.C17 102.82,55.88 103.73,56.79 108.31,56.79 X5.C17 109.22,55.98 110.03,56.79 127.41,56.79 128.32,55.88 X6.C17 130.45,56.79 152.81,56.79 153.72,55.88 X7.C17
SIG42
  Top 0.152: X1.A18 24.08,53.34 24.99,52.43 42.27,52.43 X2.A18 43.18,53.24 43.99,52.43 48.67,52.43 49.58,53.34 X3.A18 | X5.A18 105.05,52.43 109.63,52.43 110.54,53.34 X6.A18 125.37,52.43 129.95,52.43 130.86,53.34 X7.A18
  Bottom 0.152: X3.A18 64.41,52.43 68.99,52.43 69.9,53.34 X4.A18 84.73,52.43 89.31,52.43 90.22,53.34 X5.A18
SIG43
  Top 0.152: X4.B18 85.14,53.34 84.23,52.43 66.95,52.43 X3.B18
  Bottom 0.152: X1.B18 26.62,53.34 27.53,54.25 44.81,54.25 X2.B18 45.72,53.44 46.53,54.25 63.91,54.25 64.82,53.34 X3.B18 | X4.B18 87.27,54.25 104.55,54.25 105.46,53.34 X5.B18 107.59,54.25 124.87,54.25 125.78,53.34 X6.B18 127.91,54.25 150.27,54.25 151.18,53.34 X7.B18
SIG44
  Top 0.152: X1.C18 41.86,53.34 42.77,54.25 47.35,54.25 X2.C18 48.26,53.44 49.07,54.25 66.45,54.25 67.36,53.34 X3.C18 82.5,53.34 83.41,54.25 87.99,54.25 X4.C18 102.82,53.34 103.73,54.25 108.31,54.25 X5.C18 109.22,53.44 110.03,54.25 127.41,54.25 128.32,53.34 X6.C18 130.45,54.25 152.81,54.25 153.72,53.34 X7.C18
SIG45
  Top 0.152: X1.A19 24.08,50.8 24.99,49.89 42.27,49.89 X2.A19 43.18,50.7 43.99,49.89 48.67,49.89 49.58,50.8 X3.A19 | X5.A19 105.05,49.89 109.63,49.89 110.54,50.8 X6.A19 125.37,49.89 129.95,49.89 130.86,50.8 X7.A19
  Bottom 0.152: X3.A19 64.41,49.89 68.99,49.89 69.9,50.8 X4.A19 84.73,49.89 89.31,49.89 90.22,50.8 X5.A19
SIG46
  Top 0.152: X4.B19 85.14,50.8 84.23,49.89 66.95,49.89 X3.B19
  Bottom 0.152: X1.B19 26.62,50.8 27.53,51.71 44.81,51.71 X2.B19 45.72,50.9 46.53,51.71 63.91,51.71 64.82,50.8 X3.B19 | X4.B19 87.27,51.71 104.55,51.71 105.46,50.8 X5.B19 107.59,51.71 124.87,51.71 125.78,50.8 X6.B19 127.91,51.71 150.27,51.71 151.18,50.8 X7.B19
SIG47
  Top 0.152: X1.C19 41.86,50.8 42.77,51.71 47.35,51.71 X2.C19 48.26,50.9 49.07,51.71 66.45,51.71 67.36,50.8 X3.C19 82.5,50.8 83.41,51.71 87.99,51.71 X4.C19 102.82,50.8 103.73,51.71 108.31,51.71 X5.C19 109.22,50.9 110.03,51.71 127.41,51.71 128.32,50.8 X6.C19 130.45,51.71 152.81,51.71 153.72,50.8 X7.C19
SIG48
  Top 0.152: X1.A20 24.08,48.26 24.99,47.35 42.27,47.35 X2.A20 43.18,48.16 43.99,47.35 48.67,47.35 49.58,48.26 X3.A20 | X5.A20 105.05,47.35 109.63,47.35 110.54,48.26 X6.A20 125.37,47.35 129.95,47.35 130.86,48.26 X7.A20
  Bottom 0.152: X3.A20 64.41,47.35 68.99,47.35 69.9,48.26 X4.A20 84.73,47.35 89.31,47.35 90.22,48.26 X5.A20
SIG49
  Top 0.152: X4.B20 85.14,48.26 84.23,47.35 66.95,47.35 X3.B20
  Bottom 0.152: X1.B20 26.62,48.26 27.53,49.17 44.81,49.17 X2.B20 45.72,48.36 46.53,49.17 63.91,49.17 64.82,48.26 X3.B20 | X4.B20 87.27,49.17 104.55,49.17 105.46,48.26 X5.B20 107.59,49.17 124.87,49.17 125.78,48.26 X6.B20 127.91,49.17 150.27,49.17 151.18,48.26 X7.B20
SIG50
  Top 0.152: X1.C20 41.86,48.26 42.77,49.17 47.35,49.17 X2.C20 48.26,48.36 49.07,49.17 66.45,49.17 67.36,48.26 X3.C20 82.5,48.26 83.41,49.17 87.99,49.17 X4.C20 102.82,48.26 103.73,49.17 108.31,49.17 X5.C20 109.22,48.36 110.03,49.17 127.41,49.17 128.32,48.26 X6.C20 130.45,49.17 152.81,49.17 153.72,48.26 X7.C20
SIG51
  Top 0.152: X1.A21 24.08,45.72 24.99,44.81 42.27,44.81 X2.A21 43.18,45.62 43.99,44.81 48.67,44.81 49.58,45.72 X3.A21 | X5.A21 105.05,44.81 109.63,44.81 110.54,45.72 X6.A21 125.37,44.81 129.95,44.81 130.86,45.72 X7.A21
  Bottom 0.152: X3.A21 64.41,44.81 68.99,44.81 69.9,45.72 X4.A21 84.73,44.81 89.31,44.81 90.22,45.72 X5.A21
SIG52
  Top 0.152: X4.B21 85.14,45.72 84.23,44.81 66.95,44.81 X3.B21
  Bottom 0.152: X1.B21 26.62,45.72 27.53,46.63 44.81,46.63 X2.B21 45.72,45.82 46.53,46.63 63.91,46.63 64.82,45.72 X3.B21 | X4.B21 87.27,46.63 104.55,46.63 105.46,45.72 X5.B21 107.59,46.63 124.87,46.63 125.78,45.72 X6.B21 127.91,46.63 150.27,46.63 151.18,45.72 X7.B21
SIG53
  Top 0.152: X1.C21 41.86,45.72 42.77,46.63 47.35,46.63 X2.C21 48.26,45.82 49.07,46.63 66.45,46.63 67.36,45.72 X3.C21 82.5,45.72 83.41,46.63 87.99,46.63 X4.C21 102.82,45.72 103.73,46.63 108.31,46.63 X5.C21 109.22,45.82 110.03,46.63 127.41,46.63 128.32,45.72 X6.C21 130.45,46.63 152.81,46.63 153.72,45.72 X7.C21
SIG54
  Top 0.152: X1.A22 24.08,43.18 24.99,42.27 42.27,42.27 X2.A22 43.18,43.08 43.99,42.27 48.67,42.27 49.58,43.18 X3.A22 | X4.A22 84.73,42.27 89.31,42.27 90.22,43.18 X5.A22 105.05,42.27 109.63,42.27 110.54,43.18 X6.A22 125.37,42.27 129.95,42.27 130.86,43.18 X7.A22
  Bottom 0.152: X4.A22 69.9,43.18 68.99,44.09 64.41,44.09 X3.A22
SIG55
  Bottom 0.152: X1.B22 26.62,43.18 27.53,44.09 44.81,44.09 X2.B22 46.63,42.27 63.91,42.27 64.82,43.18 X3.B22 66.95,42.27 84.23,42.27 85.14,43.18 X4.B22 87.27,42.27 104.55,42.27 105.46,43.18 X5.B22 107.59,42.27 124.87,42.27 125.78,43.18 X6.B22 127.91,44.09 150.27,44.09 151.18,43.18 X7.B22
SIG56
  Top 0.152: X1.C22 41.86,43.18 42.77,44.09 47.35,44.09 X2.C22 48.26,43.28 49.07,44.09 66.45,44.09 67.36,43.18 X3.C22 82.5,43.18 83.41,44.09 87.99,44.09 X4.C22 | X5.C22 110.13,44.09 127.41,44.09 128.32,43.18 X6.C22 130.45,44.09 152.81,44.09 153.72,43.18 X7.C22
  Bottom 0.152: X4.C22 102.82,43.18 103.73,44.09 108.31,44.09 X5.C22
SIG57
  Top 0.152: X1.A23 24.08,40.64 24.99,39.73 42.27,39.73 X2.A23 43.18,40.54 43.99,39.73 48.67,39.73 49.58,40.64 X3.A23 64.41,39.73 68.99,39.73 69.9,40.64 X4.A23 84.73,39.73 89.31,39.73 90.22,40.64 X5.A23 105.05,39.73 109.63,39.73 110.54,40.64 X6.A23 125.37,39.73 129.95,39.73 130.86,40.64 X7.A23
SIG58
  Top 0.152: X4.B23 87.58,40.64 88.49,41.55 105.77,41.55 X5.B23 106.68,40.74 107.49,41.55 124.87,41.55 125.78,40.64 X6.B23
  Bottom 0.152: X1.B23 26.62,40.64 27.53,41.55 44.81,41.55 X2.B23 45.72,40.74 46.53,41.55 63.91,41.55 64.82,40.64 X3.B23 67.26,40.64 68.17,41.55 85.45,41.55 X4.B23 | X7.B23 151.18,40.64 150.27,41.55 127.91,41.55 X6.B23
SIG59
  Top 0.152: X1.C23 41.86,40.64 42.77,41.55 47.35,41.55 X2.C23 48.26,40.74 49.07,41.55 66.45,41.55 67.36,40.64 X3.C23 | X7.C23 153.72,40.64 152.81,41.55 130.45,41.55 X6.C23
  Bottom 0.152: X6.C23 128.32,40.64 127.41,39.73 110.13,39.73 X5.C23 108.31,41.55 103.73,41.55 102.82,40.64 X4.C23 87.99,39.73 83.41,39.73 82.5,40.64 X3.C23
SIG60
  Top 0.152: X1.A24 24.08,38.1 24.99,37.19 42.27,37.19 X2.A24 43.18,38 43.99,37.19 48.67,37.19 49.58,38.1 X3.A24 | X5.A24 105.05,37.19 109.63,37.19 110.54,38.1 X6.A24 125.37,37.19 129.95,37.19 130.86,38.1 X7.A24
  Bottom 0.152: X3.A24 64.41,37.19 68.99,37.19 69.9,38.1 X4.A24 84.73,37.19 89.31,37.19 90.22,38.1 X5.A24
SIG61
  Top 0.152: X4.B24 85.14,38.1 84.23,37.19 66.95,37.19 X3.B24
  Bottom 0.152: X1.B24 26.62,38.1 27.53,39.01 44.81,39.01 X2.B24 45.72,38.2 46.53,39.01 63.91,39.01 64.82,38.1 X3.B24 | X4.B24 87.27,39.01 104.55,39.01 105.46,38.1 X5.B24 107.59,39.01 124.87,39.01 125.78,38.1 X6.B24 127.91,39.01 150.27,39.01 151.18,38.1 X7.B24
SIG62
  Top 0.152: X1.C24 41.86,38.1 42.77,39.01 47.35,39.01 X2.C24 48.26,38.2 49.07,39.01 66.45,39.01 67.36,38.1 X3.C24 82.5,38.1 83.41,39.01 87.99,39.01 X4.C24 102.82,38.1 103.73,39.01 108.31,39.01 X5.C24 109.22,38.2 110.03,39.01 127.41,39.01 128.32,38.1 X6.C24 130.45,39.01 152.81,39.01 153.72,38.1 X7.C24
SIG63
  Top 0.152: X1.A25 24.08,35.56 24.99,34.65 42.27,34.65 X2.A25 43.18,35.46 43.99,34.65 48.67,34.65 49.58,35.56 X3.A25 | X5.A25 105.05,34.65 109.63,34.65 110.54,35.56 X6.A25 125.37,34.65 129.95,34.65 130.86,35.56 X7.A25
  Bottom 0.152: X3.A25 64.41,34.65 68.99,34.65 69.9,35.56 X4.A25 84.73,34.65 89.31,34.65 90.22,35.56 X5.A25
SIG64
  Top 0.152: X4.B25 85.14,35.56 84.23,34.65 66.95,34.65 X3.B25 | X7.B25 151.18,35.56 150.27,36.47 127.91,36.47 X6.B25
  Bottom 0.152: X1.B25 26.62,35.56 27.53,36.47 44.81,36.47 X2.B25 45.72,35.66 46.53,36.47 63.91,36.47 64.82,35.56 X3.B25 | X4.B25 87.27,36.47 104.55,36.47 105.46,35.56 X5.B25 107.59,36.47 124.87,36.47 125.78,35.56 X6.B25
SIG65
  Top 0.152: X1.C25 41.86,35.56 42.77,36.47 47.35,36.47 X2.C25 48.26,35.66 49.07,36.47 66.45,36.47 67.36,35.56 X3.C25 82.5,35.56 83.41,36.47 87.99,36.47 X4.C25 102.82,35.56 103.73,36.47 108.31,36.47 X5.C25
  Bottom 0.152: X5.C25 110.13,34.65 127.41,34.65 128.32,35.56 X6.C25 130.45,36.47 152.81,36.47 153.72,35.56 X7.C25
SIG66
  Top 0.152: X1.A26 24.08,33.02 24.99,33.93 42.27,33.93 X2.A26 43.18,33.12 43.99,33.93 48.67,33.93 49.58,33.02 X3.A26 64.41,33.93 68.99,33.93 69.9,33.02 X4.A26 84.73,33.93 89.31,33.93 90.22,33.02 X5.A26 105.05,32.11 109.63,32.11 110.54,33.02 X6.A26 125.37,32.11 129.95,32.11 130.86,33.02 X7.A26
SIG67
  Top 0.152: X5.B26 107.9,33.02 108.81,33.93 126.09,33.93 X6.B26
  Bottom 0.152: X7.B26 151.18,33.02 150.27,33.93 127.91,33.93 X6.B26 | X1.B26 26.62,33.02 27.53,33.93 44.81,33.93 X2.B26 45.72,33.12 46.53,33.93 63.91,33.93 64.82,33.02 X3.B26 66.95,33.93 84.23,33.93 85.14,33.02 X4.B26 87.27,33.93 104.55,33.93 105.46,33.02 X5.B26
SIG68
  Top 0.152: X1.C26 41.86,33.02 42.77,32.11 47.35,32.11 X2.C26 48.26,32.92 49.07,32.11 66.45,32.11 67.36,33.02 X3.C26 | X7.C26 153.72,33.02 152.81,33.93 130.45,33.93 X6.C26
  Bottom 0.152: X6.C26 128.32,33.02 127.41,32.11 110.03,32.11 109.22,32.92 X5.C26 108.31,32.11 103.73,32.11 102.82,33.02 X4.C26 87.99,32.11 83.41,32.11 82.5,33.02 X3.C26
SIG69
  Top 0.152: X1.A27 24.08,30.48 24.99,31.39 42.27,31.39 X2.A27 43.18,30.58 43.99,31.39 48.67,31.39 49.58,30.48 X3.A27 64.41,29.57 68.99,29.57 69.9,30.48 X4.A27 84.73,29.57 89.31,29.57 90.22,30.48 X5.A27 105.05,29.57 109.63,29.57 110.54,30.48 X6.A27 125.37,29.57 129.95,29.57 130.86,30.48 X7.A27
SIG70
  Top 0.152: X3.B27 66.95,31.39 84.23,31.39 85.14,30.48 X4.B27 87.27,31.39 104.55,31.39 105.46,30.48 X5.B27 107.59,31.39 124.87,31.39 125.78,30.48 X6.B27
  Bottom 0.152: X1.B27 26.62,30.48 27.53,31.39 44.81,31.39 X2.B27 45.72,30.58 46.53,31.39 63.91,31.39 64.82,30.48 X3.B27 | X7.B27 151.18,30.48 150.27,31.39 127.91,31.39 X6.B27
SIG71
  Top 0.152: X1.C27 41.86,30.48 42.77,29.57 47.35,29.57 X2.C27 | X7.C27 153.72,30.48 152.81,31.39 130.45,31.39 X6.C27
  Bottom 0.152: X6.C27 128.32,30.48 127.41,29.57 110.13,29.57 X5.C27 108,30.48 107.09,31.39 89.71,31.39 88.9,30.58 X4.C27 87.99,31.39 83.41,31.39 82.5,30.48 X3.C27 67.67,29.57 63.09,29.57 62.18,30.48 X2.C27
SIG72
  Top 0.152: X1.A28 24.08,27.94 24.99,28.85 42.27,28.85 X2.A28 43.18,28.04 43.99,28.85 48.67,28.85 49.58,27.94 X3.A28 64.41,28.85 68.99,28.85 69.9,27.94 X4.A28 84.73,28.85 89.31,28.85 90.22,27.94 X5.A28 105.05,28.85 109.63,28.85 110.54,27.94 X6.A28 125.37,28.85 129.95,28.85 130.86,27.94 X7.A28
SIG73
  Top 0.152: X3.B28 66.95,27.03 84.23,27.03 85.14,27.94 X4.B28 87.27,27.03 104.55,27.03 105.46,27.94 X5.B28 107.59,27.03 124.87,27.03 125.78,27.94 X6.B28 127.91,27.03 150.27,27.03 151.18,27.94 X7.B28
  Bottom 0.152: X1.B28 26.62,27.94 27.53,28.85 44.81,28.85 X2.B28 45.72,28.04 46.53,28.85 63.91,28.85 64.82,27.94 X3.B28
SIG74
  Top 0.152: X1.C28 41.86,27.94 42.77,27.03 47.35,27.03 X2.C28
  Bottom 0.152: X7.C28 153.72,27.94 152.81,28.85 130.45,28.85 X6.C28 128.32,27.94 127.41,28.85 110.13,28.85 X5.C28 108,27.94 107.09,28.85 89.71,28.85 88.9,28.04 X4.C28 87.99,28.85 83.41,28.85 82.5,27.94 X3.C28 67.67,27.03 63.09,27.03 62.18,27.94 X2.C28
SIG75
  Top 0.152: X1.A29 24.08,25.4 24.99,24.49 42.27,24.49 X2.A29 43.18,25.3 43.99,24.49 48.67,24.49 49.58,25.4 X3.A29 | X4.A29 84.73,26.31 89.31,26.31 90.22,25.4 X5.A29 105.05,26.31 109.63,26.31 110.54,25.4 X6.A29 125.37,26.31 129.95,26.31 130.86,25.4 X7.A29
  Bottom 0.152: X4.A29 69.9,25.4 68.99,24.49 64.41,24.49 X3.A29
SIG76
  Top 0.152: X5.B29 107.9,25.4 108.81,24.49 126.09,24.49 X6.B29
  Bottom 0.152: X7.B29 151.18,25.4 150.27,26.31 127.91,26.31 X6.B29 | X1.B29 26.62,25.4 27.53,26.31 44.81,26.31 X2.B29 45.72,25.5 46.53,26.31 63.91,26.31 64.82,25.4 X3.B29 66.95,26.31 84.23,26.31 85.14,25.4 X4.B29 87.27,26.31 104.55,26.31 105.46,25.4 X5.B29
SIG77
  Top 0.152: X1.C29 41.86,25.4 42.77,26.31 47.35,26.31 X2.C29 48.26,25.5 49.07,26.31 66.45,26.31 67.36,25.4 X3.C29 82.5,25.4 83.41,24.49 87.99,24.49 X4.C29 | X7.C29 153.72,25.4 152.81,24.49 130.45,24.49 X6.C29
  Bottom 0.152: X4.C29 102.82,25.4 103.73,24.49 108.31,24.49 X5.C29 109.22,25.3 110.03,24.49 127.41,24.49 128.32,25.4 X6.C29
SIG78
  Top 0.152: X1.A30 24.08,22.86 24.99,23.77 42.27,23.77 X2.A30 43.18,22.96 43.99,23.77 48.67,23.77 49.58,22.86 X3.A30 | X6.A30 110.54,22.86 109.63,23.77 105.05,23.77 X5.A30
  Bottom 0.152: X3.A30 64.41,21.95 68.99,21.95 69.9,22.86 X4.A30 84.73,21.95 89.31,21.95 90.22,22.86 X5.A30 | X7.A30 130.86,22.86 129.95,21.95 125.37,21.95 X6.A30
SIG79
  Top 0.152: X4.B30 85.14,22.86 84.23,23.77 66.95,23.77 X3.B30 | X7.B30 151.18,22.86 150.27,23.77 127.91,23.77 X6.B30
  Bottom 0.152: X1.B30 26.62,22.86 27.53,23.77 44.81,23.77 X2.B30 45.72,22.96 46.53,23.77 63.91,23.77 64.82,22.86 X3.B30 | X4.B30 87.27,23.77 104.55,23.77 105.46,22.86 X5.B30 107.59,23.77 124.87,23.77 125.78,22.86 X6.B30
SIG80
  Top 0.152: X1.C30 41.86,22.86 42.77,21.95 47.35,21.95 X2.C30 48.26,22.76 49.07,21.95 66.45,21.95 67.36,22.86 X3.C30 82.5,22.86 83.41,21.95 87.99,21.95 X4.C30 102.82,22.86 103.73,21.95 108.31,21.95 X5.C30 109.22,22.76 110.03,21.95 127.41,21.95 128.32,22.86 X6.C30 130.45,21.95 152.81,21.95 153.72,22.86 X7.C30